# Altium PCB gY-950A20200704V1.PcbDoc (part 4 of 5)
Units mm, origin at the board's own origin, x right, y up, seen from the top; angles counter-clockwise.
Board outline 59.48 x 100.3 mm, 2 copper layers (Top Layer, Bottom Layer), stack 0.193 mm thick; 144 components, 124 nets, 550 pads, 234 vias.
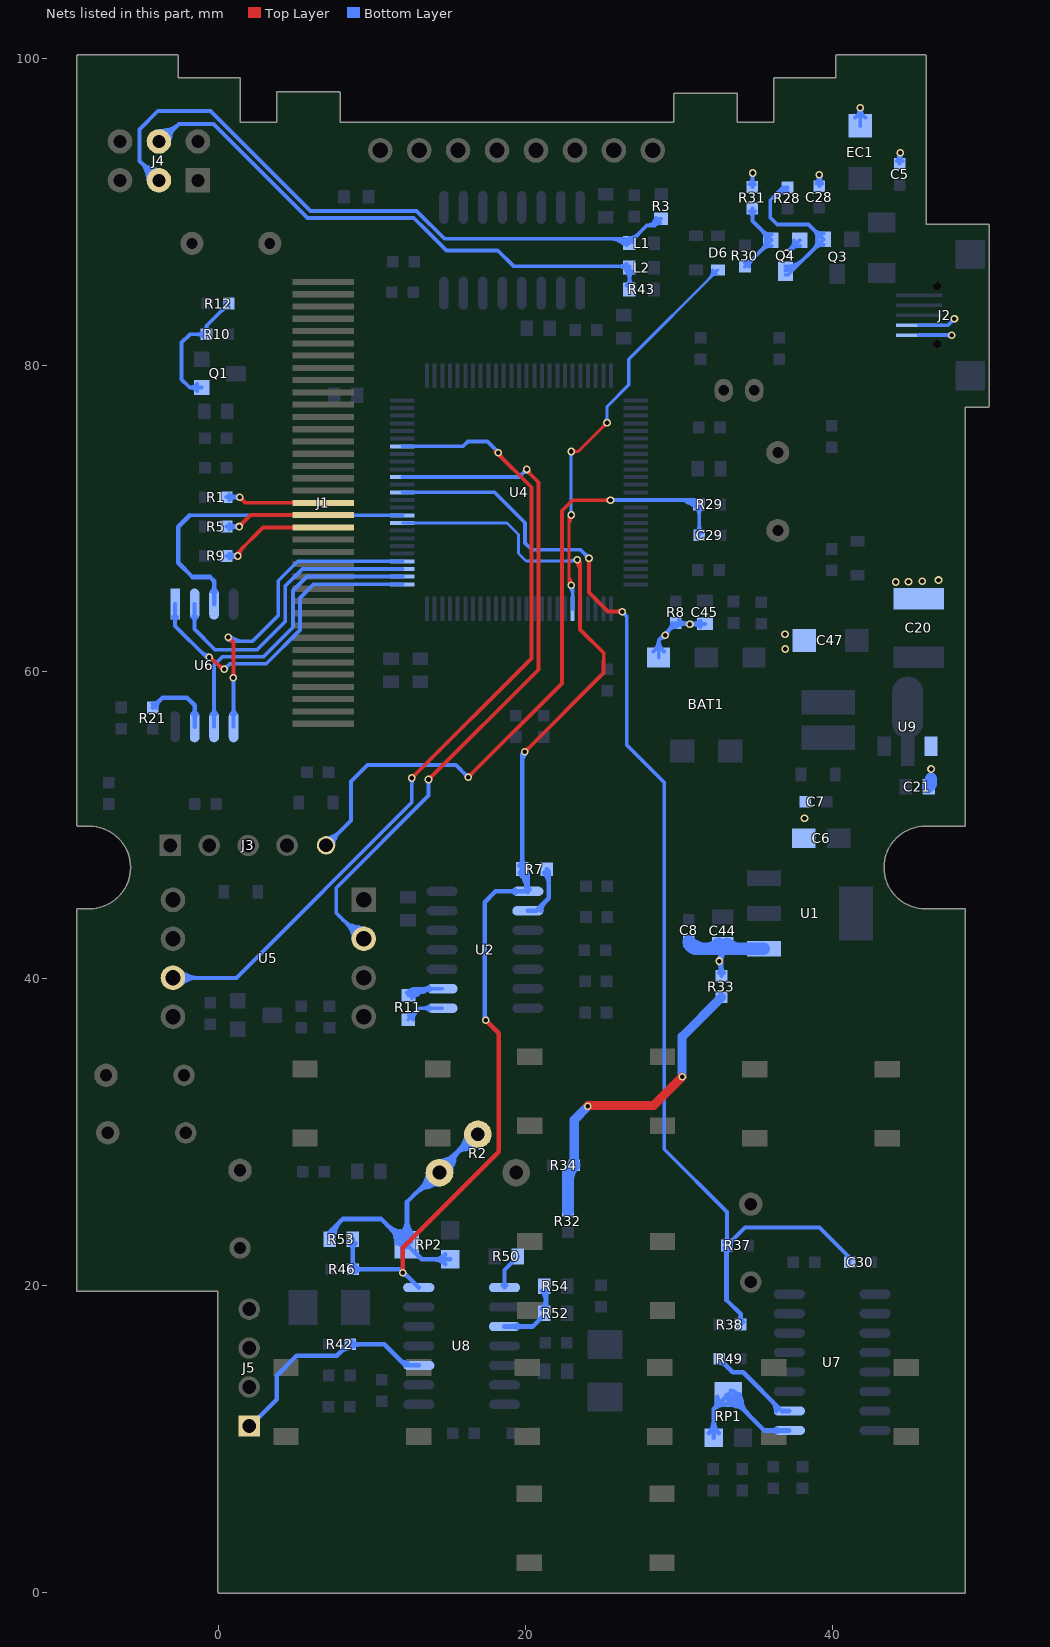
[diagram p4: the nets of this part, all layers, seen from the top]

## Via types
v1: diameter 0.5, hole 0.3, Top Layer to Bottom Layer, tented both sides, 234 vias

## Nets (pads, with @x,y where several pads share a name; then routed paths per layer and width w, separated by ;. In a path a pad name is that pad's centre, name@x,y a point inside that pad or via, vN(x,y) a via of type N, cw(c..) or ccw(c..) an arc to the next point about the centre after c; other vN are vias at no path point) (continued)
NetJ1_19: J1.19 R1.2 | length 12.7
  Top Layer w0.25: v1(1.353,71.395) 1.722,71.025 J1.19@6.807,71.025 ; 1.566,71.181 cw(c1.779,71.395) 1.478,71.395 ccw(c1.779,71.395) 1.566,71.181 ; 1.566,71.181 ccw(c1.353,70.968) 1.353,71.27 cw(c1.353,70.968) 1.566,71.181
  Bottom Layer w0.25: R1.2@0.489,71.395 v1(1.353,71.395) ; 0.904,71.34 cw(c1.033,70.858) v1@1.289,71.287 ; 0.904,71.34 cw(c1.033,70.858) v1@1.289,71.287 ; 0.904,71.34 cw(c1.033,70.858) v1@1.289,71.287 ; 0.904,71.449 ccw(c1.033,71.931) v1@1.289,71.502 ; 0.904,71.449 ccw(c1.033,71.931) v1@1.289,71.502 ; 0.904,71.449 ccw(c1.033,71.931) v1@1.289,71.502 ; 1.051,71.395 cw(c1.051,71.093) 1.264,71.306 ccw(c1.051,71.093) 1.051,71.395 ; 1.051,71.395 ccw(c1.051,71.696) 1.264,71.483 cw(c1.051,71.696) 1.051,71.395 ; v1@1.107,71.395 cw(c1.107,72.013) 0.67,71.576 ccw(c1.107,72.013) v1@1.107,71.395 ; v1@1.107,71.395 ccw(c1.107,70.777) 0.67,71.214 cw(c1.107,70.777) v1@1.107,71.395
NetJ1_20: J1.20 R5.2 | length 12.7
  Top Layer w0.25: v1(1.314,69.477) 2.063,70.225 J1.20@6.807,70.225 ; 1.528,69.69 cw(c1.314,69.904) 1.314,69.602 ccw(c1.314,69.904) 1.528,69.69 ; 1.528,69.69 ccw(c1.741,69.477) 1.439,69.477 cw(c1.741,69.477) 1.528,69.69
  Bottom Layer w0.25: R5.2@0.489,69.477 v1(1.314,69.477) ; 0.888,69.418 cw(c1.011,68.959) v1@1.251,69.369 ; 0.888,69.418 cw(c1.011,68.959) v1@1.251,69.369 ; 0.888,69.418 cw(c1.011,68.959) v1@1.251,69.369 ; 0.888,69.536 ccw(c1.011,69.995) v1@1.251,69.585 ; 0.888,69.536 ccw(c1.011,69.995) v1@1.251,69.585 ; 0.888,69.536 ccw(c1.011,69.995) v1@1.251,69.585 ; 1.013,69.477 cw(c1.013,69.175) 1.226,69.389 ccw(c1.013,69.175) 1.013,69.477 ; 1.013,69.477 ccw(c1.013,69.779) 1.226,69.565 cw(c1.013,69.779) 1.013,69.477 ; v1@1.107,69.477 cw(c1.107,70.095) 0.67,69.658 ccw(c1.107,70.095) v1@1.107,69.477 ; v1@1.107,69.477 ccw(c1.107,68.859) 0.67,69.296 cw(c1.107,68.859) v1@1.107,69.477
NetJ1_21: J1.21 R9.2 | length 14.8
  Top Layer w0.25: v1(1.226,67.559) 1.226,67.774 2.877,69.425 J1.21@6.807,69.425 ; v1@1.351,67.559 cw(c2.17,67.559) 1.59,68.138 ccw(c2.17,67.559) v1@1.351,67.559
  Bottom Layer w0.25: R9.2@0.489,67.559 v1(1.226,67.559) ; R9.2@0.708,67.426 cw(c1.065,67.208) v1@1.065,67.627 ; R9.2@0.708,67.692 ccw(c1.065,67.91) v1@1.065,67.492 ; 0.944,67.492 ccw(c0.944,67.105) R9.2@0.67,67.378 ; 0.944,67.627 cw(c0.944,68.014) R9.2@0.67,67.74 ; R9.2@0.67,67.378 cw(c1.107,66.941) v1@1.107,67.559 ; R9.2@0.67,67.378 cw(c1.107,66.941) v1@1.107,67.559 ; R9.2@0.67,67.74 ccw(c1.107,68.177) v1@1.107,67.559 ; R9.2@0.67,67.74 ccw(c1.107,68.177) v1@1.107,67.559 ; R9.2@0.855,67.492 cw(c0.96,67.099) v1@1.163,67.451 ; R9.2@0.855,67.492 cw(c0.96,67.099) v1@1.163,67.451 ; R9.2@0.855,67.492 cw(c0.96,67.099) v1@1.163,67.451 ; R9.2@0.855,67.627 ccw(c0.96,68.02) v1@1.163,67.668 ; R9.2@0.855,67.627 ccw(c0.96,68.02) v1@1.163,67.668 ; R9.2@0.855,67.627 ccw(c0.96,68.02) v1@1.163,67.668 ; 0.924,67.559 cw(c0.924,67.257) 1.137,67.471 ccw(c0.924,67.257) 0.924,67.559 ; 0.924,67.559 ccw(c0.924,67.861) 1.137,67.648 cw(c0.924,67.861) 0.924,67.559
NetJ4_3: J4.3 L1.1 R3.2 | length 67.4
  Bottom Layer w0.25: -4.783,92.783 ccw(c-3.702,93.072) J4.3@-3.927,91.976 ; -4.678,92.392 ccw(c-3.793,92.629) J4.3@-3.977,91.731 ; -4.645,92.921 cw(c-4.934,91.84) J4.3@-3.838,92.065 ; -4.254,92.816 cw(c-4.491,91.931) J4.3@-3.593,92.115 ; J4.3@-3.912,92.05 -5.182,93.32 -5.182,95.377 -3.988,96.571 -0.547,96.571 5.963,90.06 12.892,90.06 14.713,88.24 26.486,88.24 L1.1@26.759,87.967 27.896,89.103 ; 26.058,88.114 ccw(c26.255,88.455) L1.1@26.551,88.197 ; 26.321,87.963 ccw(c26.488,88.252) L1.1@26.74,88.033 ; R3.2@28.393,89.378 cw(c28.659,89.247) R3.2@28.764,89.524 ; R3.2@28.823,89.548 28.378,89.103 ; -5.064,93.202 cw(c-6.216,92.05) -4.587,92.05 ccw(c-6.216,92.05) -5.064,93.202 ; -5.064,93.202 ccw(c-3.912,94.354) -3.912,92.725 cw(c-3.912,94.354) -5.064,93.202 ; -4.637,92.775 cw(c-5.363,92.05) -4.337,92.05 ccw(c-5.363,92.05) -4.637,92.775 ; -4.637,92.775 ccw(c-3.912,93.501) -3.912,92.475 cw(c-3.912,93.501) -4.637,92.775 ; 27.896,89.103 ccw(c27.896,89.722) 28.503,89.601 cw(c27.896,89.722) 27.896,89.103 ; 27.896,89.103 28.378,89.103 ; 28.378,89.103 ccw(c28.062,89.42) 28.502,89.499 cw(c28.062,89.42) 28.378,89.103 ; 25.557,88.24 cw(c25.557,86.814) 26.565,87.822 ccw(c25.557,86.814) 25.557,88.24 ; 26.16,88.24 cw(c26.16,87.418) 26.741,87.999 ccw(c26.16,87.418) 26.16,88.24 ; L1.1@26.759,88.292 ccw(c26.759,89.076) 27.314,88.521 cw(c26.759,89.076) L1.1@26.759,88.292 ; L1.1@27.034,88.017 cw(c27.577,88.017) 27.193,88.401 ccw(c27.577,88.017) L1.1@27.034,88.017 ; 28.2,89.103 ccw(c28.2,89.662) 28.748,89.553 cw(c28.2,89.662) 28.2,89.103 ; 28.389,89.114 cw(c28.773,88.73) 28.773,89.273 ccw(c28.773,88.73) 28.389,89.114
NetJ4_4: J4.4 L2.1 R43.1 | length 54.1
  Bottom Layer w0.25: J4.4@-4.207,94.726 cw(c-3.194,94.259) -3.41,95.353 ; J4.4@-3.98,94.621 cw(c-2.645,94.006) -2.929,95.448 ; J4.4@-3.912,94.59 -3.759,94.59 -2.616,95.733 ; J4.4@-3.903,94.515 ccw(c-4.019,95.499) -3.062,95.243 ; J4.4@-3.874,94.267 ccw(c-3.972,95.105) -3.157,94.887 ; R43.1@26.759,84.944 26.759,86.455 19.209,86.455 18.182,87.482 14.83,87.482 13.534,88.777 13.528,88.777 12.698,89.607 5.776,89.607 -0.35,95.733 -2.616,95.733 ; -2.616,95.733 cw(c-3.758,96.875) -3.866,95.263 ccw(c-3.758,96.875) -2.616,95.733 ; 26.759,85.652 cw(c27.423,85.652) 26.953,86.122 ccw(c27.423,85.652) 26.759,85.652 ; 26.759,85.652 ccw(c26.095,85.652) 26.565,86.122 cw(c26.095,85.652) 26.759,85.652 ; 26.759,85.658 cw(c26.095,85.658) 26.565,85.188 ccw(c26.095,85.658) 26.759,85.658 ; 26.759,85.658 ccw(c27.423,85.658) 26.953,85.188 cw(c27.423,85.658) 26.759,85.658 ; J4.4@-3.883,95.014 ccw(c-3.807,96.145) -3.006,95.343 cw(c-3.807,96.145) J4.4@-3.883,95.014 ; J4.4@-3.237,94.59 cw(c-1.975,94.59) -2.867,95.482 ccw(c-1.975,94.59) J4.4@-3.237,94.59 ; 26.001,86.455 cw(c26.001,85.659) 26.565,86.222 ccw(c26.001,85.659) 26.001,86.455 ; 26.189,86.455 ccw(c26.189,86.986) 26.565,86.611 cw(c26.189,86.986) 26.189,86.455
NetQ1_1: Q1.G R10.2 R12.2 | length 16.2
  Bottom Layer w0.25: Q1.G@-1.129,78.542 -1.908,78.542 ; R12.2@0.641,84.018 -0.806,82.571 ; -1.908,78.542 cw(c-1.908,77.919) -1.422,78.308 ccw(c-1.908,77.919) -1.908,78.542 ; -1.908,78.542 ccw(c-1.908,79.164) -1.422,78.776 cw(c-1.908,79.164) -1.908,78.542 ; -1.908,78.542 -2.432,79.065 -2.432,81.478 -1.899,82.012 R10.2@-0.806,82.012 -0.806,82.571 ; -1.425,82.012 cw(c-1.425,81.394) -0.988,81.831 ccw(c-1.425,81.394) -1.425,82.012 ; -1.425,82.012 ccw(c-1.425,82.63) -0.988,82.193 cw(c-1.425,82.63) -1.425,82.012 ; -0.806,82.571 cw(c-1.288,82.571) -0.974,82.206 ccw(c-1.288,82.571) -0.806,82.571 ; -0.806,82.571 ccw(c-0.325,82.571) -0.639,82.206 cw(c-0.325,82.571) -0.806,82.571 ; 0.204,83.581 cw(c0.641,83.144) 0.641,83.762 ccw(c0.641,83.144) 0.204,83.581 ; 0.204,83.581 ccw(c-0.233,84.018) 0.385,84.018 cw(c-0.233,84.018) 0.204,83.581
NetQ3_1: Q3.G Q4.C R28.1 | length 24.4
  Bottom Layer w0.25: 36.557,91.195 ccw(c36.346,91.981) R28.1@37.06,91.591 ; Q4.C@36.937,85.901 37.111,85.901 Q3.G@39.411,88.201 38.433,89.179 36.398,89.179 35.941,89.637 35.941,90.754 36.774,91.588 R28.1@37.065,91.588 ; Q4.C@37.125,86.375 ccw(c37.371,86.802) 37.499,86.326 ; 38.771,87.561 cw(c39.411,86.921) 39.411,87.826 ccw(c39.411,86.921) 38.771,87.561 ; 38.771,87.561 ccw(c38.131,88.201) Q3.G@39.036,88.201 ; 38.771,87.561 ccw(c38.131,88.201) Q3.G@39.036,88.201 ; 38.771,88.842 cw(c38.131,88.201) Q3.G@39.036,88.201 ; 38.771,88.842 ccw(c39.411,89.482) 39.411,88.576 cw(c39.411,89.482) 38.771,88.842 ; 38.771,88.842 cw(c38.131,88.201) Q3.G@39.036,88.201 ; 36.132,90.945 cw(c37.065,90.012) 37.065,91.332 ccw(c37.065,90.012) 36.132,90.945 ; 36.559,91.372 cw(c37.065,90.866) 37.065,91.582 ccw(c37.065,90.866) 36.559,91.372 ; Q4.C@36.937,86.176 ccw(c36.937,87.258) 37.703,86.493 cw(c36.937,87.258) Q4.C@36.937,86.176 ; Q4.C@36.937,86.426 ccw(c36.937,88.112) 38.129,86.919 cw(c36.937,88.112) Q4.C@36.937,86.426
NetQ4_B: Q4.B R30.1 R31.2 | length 14.6
  Bottom Layer w0.25: R30.1@34.296,86.431 34.314,86.431 36.033,88.151 34.779,89.405 R31.2@34.779,90.216 ; 34.779,89.598 cw(c35.397,89.598) 34.96,90.035 ccw(c35.397,89.598) 34.779,89.598 ; 34.779,89.598 ccw(c34.161,89.598) 34.598,90.035 cw(c34.161,89.598) 34.779,89.598 ; 35.393,87.51 cw(c36.033,86.87) 36.033,87.776 ccw(c36.033,86.87) 35.393,87.51 ; 35.393,87.51 ccw(c34.753,88.151) Q4.B@35.658,88.151 ; 35.393,87.51 ccw(c34.753,88.151) Q4.B@35.658,88.151 ; 35.393,88.791 cw(c34.753,88.151) Q4.B@35.658,88.151 ; 35.393,88.791 ccw(c36.033,89.431) 36.033,88.526 cw(c36.033,89.431) 35.393,88.791 ; 35.393,88.791 cw(c34.753,88.151) Q4.B@35.658,88.151 ; R30.1@34.296,86.687 ccw(c34.296,87.348) 34.763,86.881 cw(c34.296,87.348) R30.1@34.296,86.687 ; R30.1@34.552,86.431 cw(c35.128,86.431) 34.721,86.838 ccw(c35.128,86.431) R30.1@34.552,86.431
NetR2_2: R2.2 R2.3 R53.2 RP2.2 RP2.3 | length 76.7
  Bottom Layer w0.3: R53.2@7.226,23.021 7.226,23.482 8.077,24.333 10.578,24.333 RP2.3@12.259,22.652 ; R53.2@7.248,23.085 ccw(c6.878,23.726) 7.593,23.534 ; 11.298,23.66 cw(c10.965,22.416) RP2.3@12.21,22.74 ; RP2.3@11.504,23.145 ccw(c12.35,23.371) RP2.3@12.223,22.505 ; RP2.3@11.795,23.526 cw(c11.537,22.565) RP2.3@12.501,22.815 ; 13.465,26.741 cw(c14.468,26.472) R2.2@14.365,27.505 ; 13.574,26.39 ccw(c13.223,27.702) R2.2@14.524,27.313 ; R2.2@14.231,27.371 cw(c15.264,27.268) 14.995,28.271 ; R2.2@14.423,27.212 ccw(c14.034,28.513) 15.346,28.162 ; RP2.2@15.085,21.696 13.215,21.696 RP2.3@12.259,22.652 ; 15.965,29.241 cw(c16.968,28.972) R2.3@16.865,30.005 ; 16.074,28.89 ccw(c15.723,30.202) R2.3@17.024,29.813 ; R2.3@16.88,30.059 14.38,27.559 12.259,25.438 RP2.3@12.259,22.652 ; 12.259,23.597 cw(c11.414,23.597) 12.011,23 ccw(c11.414,23.597) 12.259,23.597 ; 12.259,23.597 ccw(c13.104,23.597) 12.506,23 cw(c13.104,23.597) 12.259,23.597 ; 12.259,24.321 cw(c10.69,24.321) 11.799,23.212 ccw(c10.69,24.321) 12.259,24.321 ; 12.259,24.321 ccw(c13.828,24.321) 12.718,23.212 cw(c13.828,24.321) 12.259,24.321 ; 13.998,21.696 cw(c13.998,20.609) 14.767,21.377 ccw(c13.998,20.609) 13.998,21.696 ; 13.998,21.696 ccw(c13.998,22.782) 14.767,22.014 cw(c13.998,22.782) 13.998,21.696 ; R53.2@7.183,23.123 cw(c7.946,23.123) 7.406,23.662 ccw(c7.946,23.123) R53.2@7.183,23.123 ; R53.2@7.483,23.123 cw(c8.97,23.123) 7.918,24.174 ccw(c8.97,23.123) R53.2@7.483,23.123 ; 10.978,23.932 ccw(c12.259,25.213) 12.259,23.402 cw(c12.259,25.213) 10.978,23.932 ; 11.22,23.691 cw(c10.281,22.752) 11.609,22.752 ccw(c10.281,22.752) 11.22,23.691 ; RP2.3@11.491,23.42 ccw(c12.259,24.188) 12.259,23.102 cw(c12.259,24.188) RP2.3@11.491,23.42 ; 12.753,25.932 cw(c14.38,24.305) 14.38,26.606 ccw(c14.38,24.305) 12.753,25.932 ; 13.244,26.422 ccw(c12.31,27.356) 13.63,27.356 cw(c12.31,27.356) 13.244,26.422 ; 13.265,26.444 cw(c14.38,25.329) 14.38,26.906 ccw(c14.38,25.329) 13.265,26.444 ; R2.2@14.38,28.106 ccw(c14.38,29.426) 15.314,28.492 cw(c14.38,29.426) R2.2@14.38,28.106 ; R2.2@14.83,27.356 cw(c16.407,27.356) 15.292,28.471 ccw(c16.407,27.356) R2.2@14.83,27.356 ; R2.2@15.13,27.356 cw(c17.431,27.356) 15.804,28.983 ccw(c17.431,27.356) R2.2@15.13,27.356 ; 15.253,28.432 cw(c16.88,26.805) 16.88,29.106 ccw(c16.88,26.805) 15.253,28.432 ; 15.744,28.922 ccw(c14.81,29.856) 16.13,29.856 cw(c14.81,29.856) 15.744,28.922 ; 15.765,28.944 cw(c16.88,27.829) 16.88,29.406 ccw(c16.88,27.829) 15.765,28.944
NetR11_1: R11.1 U2.8 | length 6
  Bottom Layer w0.25: R11.1@12.338,37.325 13.086,38.073 U2.8@14.554,38.073 ; 13.409,38.073 cw(c13.409,37.639) 13.716,37.946 ccw(c13.409,37.639) 13.409,38.073 ; 13.409,38.073 ccw(c13.409,38.507) 13.716,38.201 cw(c13.409,38.507) 13.409,38.073 ; R11.1@12.388,37.6 ccw(c12.388,38.144) 12.772,37.759 cw(c12.388,38.144) R11.1@12.388,37.6 ; R11.1@12.663,37.325 cw(c13.448,37.325) 12.893,37.88 ccw(c13.448,37.325) R11.1@12.663,37.325
NetR11_2: R11.2 U2.9 | length 15.8
  Bottom Layer w0.25: R11.2@12.351,38.925 12.769,39.343 ; R11.2@12.413,38.947 ccw(c12.685,39.444) 12.975,38.958 ; R11.2@12.472,39.191 ccw(c12.665,39.912) 13.038,39.266 ; R11.2@12.533,39.167 ccw(c12.928,39.889) 13.35,39.182 ; R11.2@12.666,38.854 cw(c13.228,38.704) 12.937,39.207 ; U2.9@14.554,39.343 12.769,39.343 ; 12.769,39.343 cw(c12.423,39.689) 12.409,39.2 ccw(c12.423,39.689) 12.769,39.343 ; 12.769,39.343 ccw(c13.036,39.076) 12.668,38.989 cw(c13.036,39.076) 12.769,39.343 ; 13.409,39.343 cw(c13.409,38.909) 13.716,39.216 ccw(c13.409,38.909) 13.409,39.343 ; 13.409,39.343 ccw(c13.409,39.777) 13.716,39.471 cw(c13.409,39.777) 13.409,39.343 ; R11.2@12.242,39.084 cw(c12.867,38.46) 12.867,39.343 ccw(c12.867,38.46) R11.2@12.242,39.084 ; R11.2@12.418,38.908 cw(c13.47,37.856) 13.47,39.343 ccw(c13.47,37.856) R11.2@12.418,38.908 ; R11.2@12.595,38.731 cw(c14.074,37.252) 14.074,39.343 ccw(c14.074,37.252) R11.2@12.595,38.731 ; 13.3,39.136 ccw(c13.135,39.752) 13.687,39.433 cw(c13.135,39.752) 13.3,39.136
NetR21_1: R21.1 U6.7 | length 7.6
  Bottom Layer w0.3: R21.1@-4.318,57.683 -3.683,58.318 -2.083,58.318 -1.585,57.821 U6.7@-1.585,56.423 ; -3.924,58.078 cw(c-4.318,58.472) -4.318,57.914 ccw(c-4.318,58.472) -3.924,58.078 ; -3.924,58.078 ccw(c-3.529,57.683) -4.087,57.683 cw(c-3.529,57.683) -3.924,58.078 ; -1.585,57.526 cw(c-1.989,57.526) -1.703,57.24 ccw(c-1.989,57.526) -1.585,57.526 ; -1.585,57.526 ccw(c-1.181,57.526) -1.467,57.24 cw(c-1.181,57.526) -1.585,57.526
NetR32_2: R32.2 R33.1 R34.2 | length 21.5
  Top Layer w0.6: v1@24.079,31.725 28.327,31.725 v1(30.201,33.598)
  Bottom Layer w0.6: R34.2@23.165,27.838 23.165,30.785 v1(24.054,31.674) ; v1(30.201,33.598) 30.201,36.22 R33.1@32.766,38.786
  Bottom Layer w0.8: R32.2@22.758,24.867 22.758,27.432 R34.2@23.165,27.838 ; 22.758,26.903 cw(c24.1,26.903) R34.2@23.151,27.852
NetR49_1: R49.1 U7.10 | length 9.2
  Bottom Layer w0.3: R49.1@32.614,15.215 33.503,14.326 34.188,14.326 36.703,11.811 U7.10@37.193,11.811 ; 33.008,14.82 cw(c33.402,15.215) 32.845,15.215 ccw(c33.402,15.215) 33.008,14.82 ; 33.008,14.82 ccw(c32.614,14.426) 32.614,14.984 cw(c32.614,14.426) 33.008,14.82 ; 36.061,12.453 cw(c35.419,11.811) 36.327,11.811 ccw(c35.419,11.811) 36.061,12.453
NetR50_2: R50.2 U8.1 | length 3.7
  Bottom Layer w0.25: U8.1@18.618,19.863 18.618,21.01 R50.2@19.494,21.886 ; 18.618,20.297 cw(c18.184,20.297) 18.491,19.99 ccw(c18.184,20.297) 18.618,20.297 ; 18.618,20.297 ccw(c19.052,20.297) 18.745,19.99 cw(c19.052,20.297) 18.618,20.297
NetR52_1: R52.1 R54.2 U8.3 | length 9.1
  Bottom Layer w0.3: U8.3@18.618,17.323 20.468,17.323 21.323,18.178 21.323,19.846 R54.2@21.222,19.948 ; 19.703,17.323 cw(c19.703,17.696) 19.439,17.432 ccw(c19.703,17.696) 19.703,17.323 ; 19.703,17.323 ccw(c19.703,16.949) 19.439,17.213 cw(c19.703,16.949) 19.703,17.323 ; R52.1@21.04,18.461 ccw(c20.358,19.143) 21.323,19.143 cw(c20.358,19.143) R52.1@21.04,18.461 ; R54.2@21.04,19.665 cw(c20.358,18.982) 21.323,18.982 ccw(c20.358,18.982) R54.2@21.04,19.665
NetRP1_2: RP1.2 RP1.3 U7.9 | length 26.4
  Bottom Layer w0.3: RP1.2@32.262,10.061 32.262,11.931 ; RP1.3@33.071,12.851 ccw(c33.938,12.978) RP1.3@33.711,12.132 ; RP1.3@33.306,12.839 cw(c32.983,11.593) 34.226,11.926 ; RP1.3@33.381,13.129 cw(c33.131,12.166) RP1.3@34.093,12.423 ; U7.9@37.193,10.541 35.565,10.541 RP1.3@33.218,12.887 32.262,11.931 ; 32.262,11.148 cw(c31.176,11.148) 31.944,10.379 ccw(c31.176,11.148) 32.262,11.148 ; 32.262,11.148 ccw(c33.348,11.148) 32.58,10.379 cw(c33.348,11.148) 32.262,11.148 ; 32.262,11.931 cw(c33.01,11.183) 33.077,12.239 ccw(c33.01,11.183) 32.262,11.931 ; 32.262,11.931 ccw(c31.661,12.532) 32.487,12.733 cw(c31.661,12.532) 32.262,11.931 ; 36.108,10.541 cw(c36.108,10.167) 36.372,10.432 ccw(c36.108,10.167) 36.108,10.541 ; 36.108,10.541 ccw(c36.108,10.915) 36.372,10.65 cw(c36.108,10.915) 36.108,10.541 ; RP1.3@33.318,12.237 cw(c33.318,10.909) 34.257,11.848 ccw(c33.318,10.909) RP1.3@33.318,12.237 ; RP1.3@33.668,12.887 ccw(c34.755,12.887) 33.987,12.119 cw(c34.755,12.887) RP1.3@33.668,12.887 ; RP1.3@33.968,12.887 ccw(c35.779,12.887) 34.499,11.607 cw(c35.779,12.887) RP1.3@33.968,12.887
PGND: BAT1.2 C5.2 C6.1 C7.1 C8.1 C20.2 C21.2 C28.1 C44.1 C45.2 C47.2 EC1.2 J2.1 J2.2 Q4.E R8.1 R31.1 R33.2 U1.1 U9.1 | length 89
  Bottom Layer w0.25: BAT1.2@28.673,60.935 28.673,62.074 ; R8.1@29.794,63.195 28.673,62.074 ; R8.1@29.858,63.132 C45.2@31.691,63.132 ; R33.2@32.584,40.363 ccw(c32.291,40.654) 32.69,40.761 ; 32.703,40.751 cw(c32.967,40.904) v1@32.716,41.077 ; 32.703,41.545 ccw(c32.967,41.392) v1@32.716,41.219 ; 32.728,40.621 ccw(c33.072,40.714) R33.2@32.894,40.405 ; v1@32.737,41.171 cw(c33.172,41.251) 32.859,41.564 ; R33.2@32.766,40.183 32.766,41.95 C44.1@32.766,42.137 ; R31.1@34.779,91.613 v1@34.779,92.513 ; v1(37.008,87.281) Q4.E@37.877,88.151 ; v1@37.013,87.406 ccw(c37.026,87.74) 37.316,87.573 ; v1@37.133,87.286 cw(c37.466,87.3) 37.299,87.589 ; C28.1@39.006,91.877 ccw(c38.754,92.259) v1@39.212,92.259 ; 39.081,92.123 cw(c38.686,92.123) C28.1@38.966,91.844 ; v1@39.081,92.259 ccw(c39.539,92.259) C28.1@39.287,91.877 ; C28.1@39.147,91.663 v1(39.147,92.425) ; 39.212,92.123 ccw(c39.607,92.123) C28.1@39.328,91.844 ; EC1.2@41.814,95.6 v1(41.814,96.779) ; C5.2@44.266,93.367 ccw(c44.146,93.608) 44.406,93.538 ccw(c44.542,93.501) C5.2@44.485,93.372 ; C5.2@44.381,93.138 v1@44.381,93.886 ; J2.1@45.629,81.956 45.632,81.96 v1(47.771,81.96) ; J2.2@45.629,82.606 47.529,82.606 v1(47.955,83.033) ; 28.673,62.074 cw(c27.699,62.074) 28.332,61.334 ccw(c27.699,62.074) 28.673,62.074 ; 28.673,62.074 ccw(c29.646,62.074) 29.014,61.334 cw(c29.646,62.074) 28.673,62.074 ; 29.357,62.758 cw(c29.794,62.321) 29.794,62.939 ccw(c29.794,62.321) 29.357,62.758 ; 29.357,62.758 ccw(c28.92,63.195) 29.538,63.195 cw(c28.92,63.195) 29.357,62.758 ; 30.353,63.189 ccw(c30.453,63.562) v1@30.646,63.227 ; 30.353,63.189 ccw(c30.453,63.562) v1@30.646,63.227 ; 30.353,63.189 ccw(c30.453,63.562) v1@30.646,63.227 ; v1@30.771,63.227 ccw(c30.99,63.606) 31.103,63.184 ; v1@30.771,63.227 ccw(c30.99,63.606) 31.103,63.184 ; v1@30.771,63.227 ccw(c30.99,63.606) 31.103,63.184 ; v1@30.776,63.014 cw(c31.022,62.625) 31.142,63.07 ; v1@30.776,63.014 cw(c31.022,62.625) 31.142,63.07 ; v1@30.776,63.014 cw(c31.022,62.625) 31.142,63.07 ; v1@30.91,63.132 cw(c30.91,62.452) 31.39,62.933 ccw(c30.91,62.452) v1@30.91,63.132 ; v1@30.91,63.132 ccw(c30.91,63.811) 31.39,63.331 cw(c30.91,63.811) v1@30.91,63.132 ; v1@32.551,41.256 ccw(c32.131,41.984) C44.1@32.943,41.767 ; v1@32.551,41.256 ccw(c32.131,41.984) C44.1@32.943,41.767 ; v1@32.551,41.256 ccw(c32.131,41.984) C44.1@32.943,41.767 ; 32.766,40.801 cw(c32.148,40.801) 32.585,40.364 ccw(c32.148,40.801) 32.766,40.801 ; 32.766,40.801 ccw(c33.384,40.801) 32.947,40.364 cw(c33.384,40.801) 32.766,40.801 ; 34.779,92.231 cw(c34.161,92.231) 34.598,91.794 ccw(c34.161,92.231) 34.779,92.231 ; 34.779,92.231 ccw(c35.397,92.231) 34.96,91.794 cw(c35.397,92.231) 34.779,92.231 ; v1@36.975,87.402 ccw(c36.823,87.97) 37.333,87.676 ; v1@36.975,87.402 ccw(c36.823,87.97) 37.333,87.676 ; v1@36.975,87.402 ccw(c36.823,87.97) 37.333,87.676 ; v1@37.129,87.249 cw(c37.697,87.097) 37.403,87.606 ; v1@37.129,87.249 cw(c37.697,87.097) 37.403,87.606 ; v1@37.129,87.249 cw(c37.697,87.097) 37.403,87.606 ; 37.221,87.495 cw(c37.008,87.708) 37.008,87.406 ccw(c37.008,87.708) 37.221,87.495 ; 37.221,87.495 ccw(c37.435,87.281) 37.133,87.281 cw(c37.435,87.281) 37.221,87.495 ; 37.237,87.51 cw(c37.877,86.87) 37.877,87.776 ccw(c37.877,86.87) 37.237,87.51 ; 37.237,87.51 ccw(c36.597,88.151) 37.502,88.151 cw(c36.597,88.151) 37.237,87.51 ; C28.1@38.966,91.844 ccw(c38.529,92.281) v1@39.147,92.281 ; C28.1@38.966,91.844 ccw(c38.529,92.281) v1@39.147,92.281 ; v1@39.038,92.363 cw(c38.667,92.148) C28.1@39.081,92.037 ; v1@39.038,92.363 cw(c38.667,92.148) C28.1@39.081,92.037 ; v1@39.038,92.363 cw(c38.667,92.148) C28.1@39.081,92.037 ; 39.147,92.124 cw(c39.448,92.124) 39.235,92.337 ccw(c39.448,92.124) 39.147,92.124 ; 39.147,92.124 ccw(c38.845,92.124) 39.058,92.337 cw(c38.845,92.124) 39.147,92.124 ; v1@39.147,92.281 ccw(c39.765,92.281) C28.1@39.328,91.844 ; v1@39.147,92.281 ccw(c39.765,92.281) C28.1@39.328,91.844 ; C28.1@39.212,92.037 cw(c39.627,92.148) v1@39.255,92.363 ; C28.1@39.212,92.037 cw(c39.627,92.148) v1@39.255,92.363 ; C28.1@39.212,92.037 cw(c39.627,92.148) v1@39.255,92.363 ; v1@41.705,96.717 cw(c41.444,96.566) 41.736,96.488 ; v1@41.705,96.717 cw(c41.444,96.566) 41.736,96.488 ; v1@41.705,96.717 cw(c41.444,96.566) 41.736,96.488 ; 41.736,96.488 cw(c42.027,96.41) v1@41.876,96.671 ; 41.736,96.488 cw(c42.027,96.41) v1@41.876,96.671 ; 41.736,96.488 cw(c42.027,96.41) v1@41.876,96.671 ; v1@41.751,96.671 cw(c41.6,96.41) 41.892,96.488 ; v1@41.751,96.671 cw(c41.6,96.41) 41.892,96.488 ; v1@41.751,96.671 cw(c41.6,96.41) 41.892,96.488 ; 41.814,96.478 cw(c42.115,96.478) 41.902,96.691 ccw(c42.115,96.478) 41.814,96.478 ; 41.814,96.478 ccw(c41.512,96.478) 41.725,96.691 cw(c41.512,96.478) 41.814,96.478 ; v1(41.814,96.779) cw(c41.04,96.779) 41.464,96.133 ccw(c41.04,96.779) v1(41.814,96.779) ; v1(41.814,96.779) ccw(c42.587,96.779) 42.163,96.133 cw(c42.587,96.779) v1(41.814,96.779) ; 41.892,96.488 cw(c42.183,96.566) v1@41.922,96.717 ; 41.892,96.488 cw(c42.183,96.566) v1@41.922,96.717 ; 41.892,96.488 cw(c42.183,96.566) v1@41.922,96.717 ; v1@44.316,93.79 cw(c44.105,93.669) 44.341,93.605 ; v1@44.316,93.79 cw(c44.105,93.669) 44.341,93.605 ; v1@44.316,93.79 cw(c44.105,93.669) 44.341,93.605 ; 44.32,93.526 cw(c44.667,93.433) v1@44.487,93.745 ; 44.32,93.526 cw(c44.667,93.433) v1@44.487,93.745 ; 44.32,93.526 cw(c44.667,93.433) v1@44.487,93.745 ; v1@44.381,93.756 cw(c43.763,93.756) 44.2,93.319 ccw(c43.763,93.756) v1@44.381,93.756 ; v1@44.381,93.756 ccw(c44.999,93.756) 44.562,93.319 cw(c44.999,93.756) v1@44.381,93.756 ; 44.434,93.559 cw(c44.612,93.607) v1@44.5,93.753 ; 44.434,93.559 cw(c44.612,93.607) v1@44.5,93.753 ; 44.434,93.559 cw(c44.612,93.607) v1@44.5,93.753 ; 47.469,81.96 cw(c47.469,81.658) 47.683,81.871 ccw(c47.469,81.658) 47.469,81.96 ; 47.469,81.96 ccw(c47.469,82.261) 47.683,82.048 cw(c47.469,82.261) 47.469,81.96 ; 47.742,82.819 cw(c47.955,82.606) 47.955,82.908 ccw(c47.955,82.606) 47.742,82.819 ; 47.742,82.819 ccw(c47.528,83.033) 47.83,83.033 cw(c47.528,83.033) 47.742,82.819 ; 28.678,62.079 cw(c29.108,61.649) 29.108,62.257 ccw(c29.108,61.649) 28.678,62.079 ; v1@29.233,62.382 cw(c29.842,62.382) 29.412,62.813 ccw(c29.842,62.382) v1@29.233,62.382 ; R8.1@29.975,63.014 cw(c30.259,62.73) 30.259,63.132 ccw(c30.259,62.73) R8.1@29.975,63.014 ; R8.1@29.975,63.376 ccw(c30.565,63.966) 30.565,63.132 cw(c30.565,63.966) R8.1@29.975,63.376 ; 30.376,63.132 cw(c30.376,62.786) 30.62,63.031 ccw(c30.376,62.786) 30.376,63.132 ; 30.438,63.132 ccw(c30.438,63.39) 30.62,63.207 cw(c30.438,63.39) 30.438,63.132 ; v1@30.797,63.031 cw(c31.041,62.786) 31.041,63.132 ccw(c31.041,62.786) v1@30.797,63.031 ; v1@30.797,63.207 ccw(c30.979,63.39) 30.979,63.132 cw(c30.979,63.39) v1@30.797,63.207 ; v1@32.525,41.06 cw(c31.944,40.478) 32.766,40.478 ccw(c31.944,40.478) v1@32.525,41.06 ; v1@32.525,41.236 ccw(c31.944,41.818) 32.766,41.818 cw(c31.944,41.818) v1@32.525,41.236 ; C44.1@32.589,41.959 cw(c32.161,41.531) 32.766,41.531 ccw(c32.161,41.531) C44.1@32.589,41.959 ; v1@32.766,41.107 cw(c33.971,41.107) 33.119,41.959 ccw(c33.971,41.107) v1@32.766,41.107 ; 32.766,41.711 cw(c33.368,41.711) 32.942,42.136 ccw(c33.368,41.711) 32.766,41.711 ; v1@34.71,92.444 cw(c34.542,92.277) 34.779,92.277 ccw(c34.542,92.277) v1@34.71,92.444 ; 34.779,92.184 cw(c35.146,92.184) 34.886,92.444 ccw(c35.146,92.184) 34.779,92.184 ; C5.2@44.381,93.446 cw(c44.831,93.446) 44.513,93.765 ccw(c44.831,93.446) C5.2@44.381,93.446
  Bottom Layer w0.8: C8.1@30.633,42.444 31.127,41.95 ; U1.1@35.542,41.95 32.766,41.95 31.127,41.95 ; C21.2@46.266,52.519 C21.2@46.431,52.684 ; 31.127,41.95 cw(c31.127,42.464) 30.614,42.444 ccw(c31.127,42.464) 31.127,41.95 ; C8.1@30.62,42.431 ccw(c31.78,43.591) 31.78,41.95 cw(c31.78,43.591) C8.1@30.62,42.431 ; 31.751,41.95 ccw(c31.751,43.127) 32.583,42.295 cw(c31.751,43.127) 31.751,41.95 ; C44.1@33.125,42.295 ccw(c33.957,43.127) 33.957,41.95 cw(c33.957,43.127) C44.1@33.125,42.295 ; C21.2@46.261,52.625 ccw(c45.852,53.034) 46.431,53.034 cw(c45.852,53.034) C21.2@46.261,52.625
  other v1: 32.614,41.148 38.176,50.47 46.431,53.67 36.932,61.493 29.108,62.382 36.906,62.459 30.709,63.119 44.12,65.862 44.958,65.888 45.847,65.913 46.914,65.989 34.798,92.532 44.425,93.853
RE1: C30.1 R37.1 R38.1 U4.63 | length 90
  Top Layer w0.25: v1(24.13,67.412) 24.13,65.176 25.375,63.932 v1(26.289,63.932) ; 24.13,67.11 cw(c24.432,67.11) 24.218,67.323 ccw(c24.432,67.11) 24.13,67.11 ; 24.13,67.11 ccw(c23.828,67.11) 24.042,67.323 cw(c23.828,67.11) 24.13,67.11 ; 25.987,63.932 cw(c25.987,63.63) 26.201,63.843 ccw(c25.987,63.63) 25.987,63.932 ; 25.987,63.932 ccw(c25.987,64.234) 26.201,64.02 cw(c25.987,64.234) 25.987,63.932
  Bottom Layer w0.25: U4.63@11.966,71.712 17.975,71.712 19.962,69.725 19.962,68.404 20.396,67.97 23.571,67.97 v1@24.054,67.488 ; v1(26.289,63.932) 26.594,63.627 26.594,55.245 29.038,52.801 29.038,28.874 33.122,24.79 R37.1@33.122,22.606 34.29,23.774 39.167,23.774 41.124,21.818 C30.1@41.124,21.513 ; 23.917,67.625 cw(c23.703,67.412) 24.005,67.412 ccw(c23.703,67.412) 23.917,67.625 ; 23.917,67.625 ccw(c24.13,67.838) 24.13,67.537 cw(c24.13,67.838) 23.917,67.625 ; 26.502,63.718 cw(c26.716,63.932) 26.414,63.932 ccw(c26.716,63.932) 26.502,63.718 ; 26.502,63.718 ccw(c26.289,63.505) 26.289,63.807 cw(c26.289,63.505) 26.502,63.718 ; 33.122,23.224 cw(c32.504,23.224) 32.941,22.787 ccw(c32.504,23.224) 33.122,23.224 ; 33.122,23.224 ccw(c33.74,23.224) 33.303,22.787 cw(c33.74,23.224) 33.122,23.224 ; 33.559,23.043 cw(c33.122,23.48) 33.122,22.862 ccw(c33.122,23.48) 33.559,23.043 ; 33.559,23.043 ccw(c33.996,22.606) 33.378,22.606 cw(c33.996,22.606) 33.559,23.043
  Bottom Layer w0.3: R37.1@33.122,22.606 33.096,22.581 33.096,19.05 34.011,18.136 R38.1@34.011,17.45 ; 34.011,18.007 cw(c33.453,18.007) 33.847,17.613 ccw(c33.453,18.007) 34.011,18.007 ; 34.011,18.007 ccw(c34.568,18.007) 34.174,17.613 cw(c34.568,18.007) 34.011,18.007 ; R37.1@32.958,22.443 cw(c32.625,22.11) 33.096,22.11 ccw(c32.625,22.11) R37.1@32.958,22.443 ; 33.096,21.987 cw(c33.741,21.987) 33.285,22.443 ccw(c33.741,21.987) 33.096,21.987
RE2: R7.1 R46.2 R53.1 U2.1 U4.59 U8.14 | length 98.2
  Top Layer w0.25: v1(19.939,54.788) 25.07,59.919 25.07,60.707 25.089,60.727 25.089,61.225 23.54,62.774 23.54,67.138 v1(23.368,67.31) ; 23.475,66.884 cw(c23.787,67.064) v1@23.476,67.247 ; 20.152,55.001 cw(c19.939,55.215) 19.939,54.913 ccw(c19.939,55.215) 20.152,55.001 ; 20.152,55.001 ccw(c20.366,54.788) 20.064,54.788 cw(c20.366,54.788) 20.152,55.001 ; v1@23.28,67.222 cw(c22.651,66.593) 23.54,66.593 ccw(c22.651,66.593) v1@23.28,67.222
  Top Layer w0.3: v1(11.989,20.828) 11.989,22.454 18.237,28.702 18.237,35.001 18.237,36.449 v1(17.399,37.287)
  Bottom Layer w0.203: U4.59@11.966,69.712 18.781,69.712 19.533,68.961 19.533,67.726 20.025,67.234 v1@23.165,67.234 ; 22.826,67.234 ccw(c22.826,67.852) 23.263,67.415 cw(c22.826,67.852) 22.826,67.234
  Bottom Layer w0.3: R53.1@8.725,23.021 8.725,21.069 R46.2@8.738,21.057 11.836,21.057 U8.14@13.03,19.863 ; v1@17.323,37.287 17.323,44.983 18.033,45.693 U2.1@20.142,45.693 20.142,46.781 R7.1@19.774,47.149 v1@19.774,54.623 ; R7.1@19.73,47.123 ccw(c20.109,46.914) 19.739,46.69 ; R7.1@19.756,46.849 cw(c19.724,46.396) 20.113,46.631 ; R7.1@19.993,46.978 ccw(c20.635,46.624) 20.007,46.245 ; R7.1@20.017,47.039 ccw(c20.443,46.933) R7.1@20.067,46.707 ; 8.725,22.3 cw(c9.344,22.3) 8.906,22.738 ccw(c9.344,22.3) 8.725,22.3 ; 8.725,22.3 ccw(c8.106,22.3) 8.544,22.738 cw(c8.106,22.3) 8.725,22.3 ; R46.2@8.901,21.22 ccw(c9.295,21.614) 9.295,21.057 ; R46.2@8.901,21.22 cw(c9.326,21.645) 8.725,21.645 ccw(c9.326,21.645) R46.2@8.901,21.22 ; R46.2@8.901,21.22 ccw(c9.295,21.614) 9.295,21.057 ; 9.295,21.057 ccw(c9.295,20.499) 8.901,20.893 cw(c9.295,20.499) 9.295,21.057 ; 19.057,45.693 cw(c19.057,45.32) 19.322,45.584 ccw(c19.057,45.32) 19.057,45.693 ; 19.057,45.693 ccw(c19.057,46.067) 19.322,45.803 cw(c19.057,46.067) 19.057,45.693 ; 19.774,47.802 cw(c19.17,47.802) 19.597,47.376 ccw(c19.17,47.802) 19.774,47.802 ; 19.774,47.802 ccw(c20.378,47.802) 19.951,47.376 cw(c20.378,47.802) 19.774,47.802 ; 20.142,46.067 cw(c19.768,46.067) 20.033,45.803 ccw(c19.768,46.067) 20.142,46.067 ; 20.142,46.067 ccw(c20.516,46.067) 20.252,45.803 cw(c20.516,46.067) 20.142,46.067 ; R46.2@8.574,21.22 ccw(c8.21,21.584) 8.725,21.584 cw(c8.21,21.584) R46.2@8.574,21.22 ; v1@11.989,20.728 cw(c11.989,20.303) 12.29,20.603 ccw(c11.989,20.303) v1@11.989,20.728 ; 17.323,37.713 ccw(c17.824,37.713) 17.47,37.358 cw(c17.824,37.713) 17.323,37.713 ; R7.1@19.601,46.919 cw(c18.376,45.646) 20.142,45.646 ccw(c18.376,45.646) R7.1@19.601,46.919 ; 19.774,54.148 cw(c20.579,54.148) 20.01,54.717 ccw(c20.579,54.148) 19.774,54.148 ; R7.1@19.809,47.135 cw(c19.055,46.351) 20.142,46.351 ccw(c19.055,46.351) R7.1@19.809,47.135 ; U2.1@20.008,45.771 ccw(c19.721,45.937) 20.041,46.023 cw(c19.721,45.937) U2.1@20.008,45.771 ; 20.026,46.08 ccw(c20.427,46.187) 20.22,45.827 cw(c20.427,46.187) 20.026,46.08
RE2-OUT: R7.2 U2.2 | length 6.5
  Bottom Layer w0.3: U2.2@20.142,44.423 20.7,44.423 21.511,45.235 21.511,46.999 R7.2@21.374,47.136 ; U2.2@21.008,44.423 cw(c21.753,44.423) 21.226,44.95 ccw(c21.753,44.423) U2.2@21.008,44.423 ; R7.2@21.197,46.909 cw(c20.439,46.151) 21.511,46.151 ccw(c20.439,46.151) R7.2@21.197,46.909
RED: J5.1 R42.1 U8.10 | length 19.2
  Bottom Layer w0.3: J5.1@1.971,10.833 2.034,10.833 3.759,12.558 3.759,14.122 5.057,15.42 7.69,15.42 8.424,16.154 R42.1@8.56,16.154 10.77,16.154 12.141,14.783 U8.10@13.03,14.783 ; 9.117,16.154 cw(c9.117,16.712) 8.723,16.318 ccw(c9.117,16.712) 9.117,16.154 ; 9.117,16.154 ccw(c9.117,15.597) 8.723,15.991 cw(c9.117,15.597) 9.117,16.154 ; 7.934,15.664 cw(c8.56,15.039) 8.56,15.923 ccw(c8.56,15.039) 7.934,15.664 ; 11.751,15.173 ccw(c12.319,15.741) 12.319,14.938 cw(c12.319,15.741) 11.751,15.173
RESET: C29.2 J3.5 R29.1 U4.14 | length 63.4
  Top Layer w0.254: v1(16.256,53.137) 22.377,59.258 22.377,70.51 23.063,71.196 v1(25.527,71.196) ; 16.466,53.347 cw(c16.256,53.557) 16.256,53.26 ccw(c16.256,53.557) 16.466,53.347 ; 16.466,53.347 ccw(c16.676,53.137) 16.379,53.137 cw(c16.676,53.137) 16.466,53.347 ; 25.23,71.196 cw(c25.23,70.899) 25.44,71.109 ccw(c25.23,70.899) 25.23,71.196 ; 25.23,71.196 ccw(c25.23,71.493) 25.44,71.283 cw(c25.23,71.493) 25.23,71.196
  Bottom Layer w0.25: v1@25.543,71.212 U4.14@27.166,71.212 30.997,71.212 R29.1@31.293,70.917 31.317,70.892 C29.2@31.317,68.911 ; 30.506,71.085 ccw(c30.795,71.586) R29.1@31.14,71.122 ; 30.836,70.895 ccw(c31.042,71.253) R29.1@31.289,70.922 ; R29.1@31.04,70.876 ccw(c30.62,70.807) 30.833,71.176 ccw(c31.036,71.528) R29.1@31.194,71.153 ; R29.1@31.112,70.736 ccw(c29.962,69.586) 29.962,71.212 cw(c29.962,69.586) R29.1@31.112,70.736 ; R29.1@31.112,70.736 cw(c30.616,70.24) 31.317,70.24 ccw(c30.616,70.24) R29.1@31.112,70.736 ; 31.317,69.529 cw(c30.699,69.529) 31.136,69.092 ccw(c30.699,69.529) 31.317,69.529 ; 31.317,69.529 ccw(c31.935,69.529) 31.498,69.092 cw(c31.935,69.529) 31.317,69.529 ; v1@25.615,71.108 cw(c25.867,70.856) 25.867,71.212 ccw(c25.867,70.856) v1@25.615,71.108 ; v1@25.615,71.285 ccw(c25.79,71.459) 25.79,71.212 cw(c25.79,71.459) v1@25.615,71.285 ; 30.565,71.212 cw(c30.565,70.189) 31.289,70.913 ccw(c30.565,70.189) 30.565,71.212 ; 31.317,70.358 cw(c31.852,70.358) 31.474,70.736 ccw(c31.852,70.358) 31.317,70.358
  Bottom Layer w0.254: J3.5@6.951,48.703 cw(c7.733,48.543) 7.526,49.314 ; J3.5@6.985,48.696 8.611,50.321 8.611,52.857 9.677,53.924 15.443,53.924 v1@16.154,53.213 ; J3.5@6.992,48.662 ccw(c6.832,49.444) 7.603,49.237 ; 7.792,49.503 cw(c6.985,50.311) 6.985,49.169 ccw(c6.985,50.311) 7.792,49.503 ; 7.792,49.503 ccw(c8.6,48.696) 7.458,48.696 cw(c8.6,48.696) 7.792,49.503 ; 16.003,53.365 ccw(c16.256,53.618) 16.256,53.26 cw(c16.256,53.618) 16.003,53.365 ; 16.064,53.303 cw(c15.897,53.137) 16.133,53.137 ccw(c15.897,53.137) 16.064,53.303
RST: U4.69 U5.6 | length 66.1
  Top Layer w0.254: v1(12.573,53.086) 20.367,60.88 20.367,72.038 v1@18.034,74.371 ; 12.783,53.296 cw(c12.573,53.506) 12.573,53.209 ccw(c12.573,53.506) 12.783,53.296 ; 12.783,53.296 ccw(c12.993,53.086) 12.696,53.086 cw(c12.993,53.086) 12.783,53.296 ; v1@18.335,74.295 ccw(c18.877,74.295) 18.494,73.912 cw(c18.877,74.295) v1@18.335,74.295
  Bottom Layer w0.254: U5.6@-3.124,40.056 1.141,40.056 12.573,51.488 v1(12.573,53.086) ; U4.69@11.966,74.712 15.923,74.712 16.234,75.024 17.509,75.024 v1@18.237,74.295 ; -1.986,40.056 cw(c-1.986,41.067) -2.701,40.352 ccw(c-1.986,41.067) -1.986,40.056 ; -1.986,40.056 ccw(c-1.986,39.044) -2.701,39.76 cw(c-1.986,39.044) -1.986,40.056 ; -1.372,40.056 cw(c-1.372,41.681) -2.521,40.532 ccw(c-1.372,41.681) -1.372,40.056 ; -1.372,40.056 ccw(c-1.372,38.431) -2.521,39.58 cw(c-1.372,38.431) -1.372,40.056 ; 12.573,52.789 cw(c12.87,52.789) 12.66,52.999 ccw(c12.87,52.789) 12.573,52.789 ; 12.573,52.789 ccw(c12.276,52.789) 12.486,52.999 cw(c12.276,52.789) 12.573,52.789 ; 17.984,74.548 cw(c17.731,74.295) 18.089,74.295 ccw(c17.731,74.295) 17.984,74.548 ; 18.045,74.487 ccw(c18.212,74.654) 18.212,74.418 cw(c18.212,74.654) 18.045,74.487
  other v1: 18.212,74.295
SOFT_POWER: D6.1 U4.31 | length 42.9
  Top Layer w0.203: v1@22.851,65.758 ccw(c22.645,65.942) 22.884,66.08 ; v1@22.851,70.132 cw(c22.645,69.948) 22.884,69.81 ; v1(22.962,65.659) 22.813,65.807 22.813,70.159 v1@23.038,70.383 ; v1(22.962,74.371) 23.419,74.371 v1(25.298,76.251) ; v1@25.15,76.249 cw(c24.808,76.244) 25.048,76.001 cw(c25.292,75.76) v1@25.296,76.102 ; 23.32,74.371 cw(c23.32,74.729) 23.067,74.476 ccw(c23.32,74.729) 23.32,74.371 ; 23.32,74.371 ccw(c23.32,74.013) 23.067,74.266 cw(c23.32,74.013) 23.32,74.371 ; 25.045,75.997 cw(c25.298,75.744) v1@25.298,76.102 ; 25.045,75.997 ccw(c24.792,76.251) 25.15,76.251 cw(c24.792,76.251) 25.045,75.997 ; 25.045,75.997 ccw(c24.797,76.249) v1@25.15,76.25 ; 25.045,75.997 cw(c25.296,75.749) v1@25.298,76.102 ; 25.045,75.997 cw(c25.298,75.744) v1@25.298,76.102 ; 25.049,76.001 cw(c25.295,75.752) v1@25.297,76.102 ; 25.049,76.001 cw(c25.295,75.752) v1@25.297,76.102 ; 25.049,76.001 ccw(c24.799,76.248) v1@25.15,76.25 ; 25.049,76.001 ccw(c24.799,76.248) v1@25.15,76.25 ; 22.813,65.885 ccw(c23.188,65.885) 22.923,65.62 cw(c23.188,65.885) 22.813,65.885 ; 22.813,66.376 ccw(c23.678,66.376) 23.067,65.764 cw(c23.678,66.376) 22.813,66.376 ; 22.813,69.514 cw(c23.678,69.514) 23.067,70.126 ccw(c23.678,69.514) 22.813,69.514 ; 22.813,70.005 cw(c23.188,70.005) 22.923,70.27 ccw(c23.188,70.005) 22.813,70.005
  Bottom Layer w0.203: v1(22.962,70.231) v1(22.962,74.371) ; v1(25.298,76.251) 25.298,77.292 26.721,78.715 26.721,80.383 D6.1@32.544,86.205 ; 32.074,85.751 cw(c32.651,85.597) D6.1@32.458,86.163 ; 22.962,70.589 cw(c22.603,70.589) 22.857,70.336 ccw(c22.603,70.589) 22.962,70.589 ; 22.962,70.589 ccw(c23.32,70.589) 23.067,70.336 cw(c23.32,70.589) 22.962,70.589 ; 22.962,74.013 cw(c23.32,74.013) 23.067,74.266 ccw(c23.32,74.013) 22.962,74.013 ; 22.962,74.013 ccw(c22.603,74.013) 22.857,74.266 cw(c22.603,74.013) 22.962,74.013 ; 25.298,76.609 cw(c24.94,76.609) 25.193,76.356 ccw(c24.94,76.609) 25.298,76.609 ; 25.298,76.609 ccw(c25.657,76.609) 25.403,76.356 cw(c25.657,76.609) 25.298,76.609 ; 31.949,85.611 ccw(c31.354,86.205) 32.195,86.205 cw(c31.354,86.205) 31.949,85.611 ; 32.19,85.852 cw(c32.444,85.599) 32.444,85.957 ccw(c32.444,85.599) 32.19,85.852
  Bottom Layer w0.25: v1(22.962,65.659) 23.066,65.554 U4.31@23.066,64.112 ; 23.009,65.336 cw(c23.169,65.428) v1@23.045,65.566 ; v1@22.873,65.571 cw(c22.407,65.105) 23.066,65.105 ccw(c22.407,65.105) v1@22.873,65.571
SPI_CS: U4.51 U6.1 | length 26.3
  Top Layer w0.25: v1(-0.635,60.96) -0.61,60.96 -0.584,60.985 0.229,60.173 v1(0.356,60.173) ; v1@-0.635,60.835 cw(c-0.635,60.349) -0.292,60.693 ccw(c-0.635,60.349) v1@-0.635,60.835 ; -0.075,60.476 ccw(c0.356,60.906) 0.356,60.298 cw(c0.356,60.906) -0.075,60.476
  Bottom Layer w0.25: U6.1@-2.855,64.423 -2.855,63.002 -0.838,60.985 -0.584,60.985 -0.61,60.96 v1(-0.635,60.96) ; v1(0.356,60.173) 0.719,60.536 3.087,60.536 5.279,62.728 5.279,64.821 6.171,65.712 U4.51@11.966,65.712 ; -2.855,63.26 cw(c-2.39,63.26) -2.719,63.589 ccw(c-2.39,63.26) -2.855,63.26 ; -2.855,63.26 ccw(c-3.32,63.26) -2.991,63.589 cw(c-3.32,63.26) -2.855,63.26 ; 0.569,60.386 cw(c0.356,60.599) 0.356,60.298 ccw(c0.356,60.599) 0.569,60.386 ; 0.569,60.386 ccw(c0.782,60.173) 0.481,60.173 cw(c0.782,60.173) 0.569,60.386 ; -1.152,61.299 ccw(c-0.635,61.816) -0.635,61.085 cw(c-0.635,61.816) -1.152,61.299
SPI_SCK: U4.52 U6.6 | length 21.5
  Bottom Layer w0.25: U6.6@-0.315,56.423 -0.315,60.442 0.233,60.989 2.9,60.989 4.826,62.916 4.826,65.303 5.735,66.212 U4.52@11.966,66.212 ; -0.315,57.586 cw(c-0.78,57.586) -0.451,57.258 ccw(c-0.78,57.586) -0.315,57.586 ; -0.315,57.586 ccw(c0.15,57.586) -0.179,57.258 cw(c0.15,57.586) -0.315,57.586
SPI_SI: U4.54 U6.5 | length 29.5
  Top Layer w0.25: v1(0.61,62.255) 0.955,61.91 0.955,59.629 v1(0.94,59.614) ; 0.823,62.042 cw(c1.036,62.255) 0.735,62.255 ccw(c1.036,62.255) 0.823,62.042 ; 0.823,62.042 ccw(c0.61,61.829) 0.61,62.13 cw(c0.61,61.829) 0.823,62.042 ; v1@0.851,59.702 ccw(c0.601,59.952) 0.955,59.952 cw(c0.601,59.952) v1@0.851,59.702 ; 0.955,59.879 ccw(c1.205,59.879) 1.028,59.702 cw(c1.205,59.879) 0.955,59.879
  Bottom Layer w0.25: v1@0.61,62.281 v1(0.61,62.255) 0.864,62.001 2.188,62.001 3.865,63.678 3.865,65.942 5.135,67.212 U4.54@11.966,67.212 ; v1@0.646,62.136 cw(c0.835,61.51) 1.162,62.076 ; v1(0.94,59.614) 0.955,59.599 U6.5@0.955,56.423 ; 0.823,62.042 cw(c1.036,62.255) 0.735,62.255 ccw(c1.036,62.255) 0.823,62.042 ; 0.823,62.042 ccw(c0.61,61.829) 0.61,62.13 cw(c0.61,61.829) 0.823,62.042 ; 0.955,57.586 cw(c0.49,57.586) 0.819,57.258 ccw(c0.49,57.586) 0.955,57.586 ; 0.955,57.586 ccw(c1.42,57.586) 1.091,57.258 cw(c1.42,57.586) 0.955,57.586 ; v1@0.521,62.167 ccw(c0.921,62.567) 0.921,62.001 cw(c0.921,62.567) v1@0.521,62.167 ; v1@0.698,62.344 ccw(c1.525,63.17) 1.525,62.001 cw(c1.525,63.17) v1@0.698,62.344 ; v1@0.851,59.525 cw(c0.601,59.275) 0.955,59.275 ccw(c0.601,59.275) v1@0.851,59.525 ; 0.955,59.349 cw(c1.205,59.349) 1.028,59.525 ccw(c1.205,59.349) 0.955,59.349
SPI_SO: U4.53 U6.2 | length 20.8
  Bottom Layer w0.25: U6.2@-1.585,64.423 -1.585,62.804 -1.6,62.789 -0.254,61.443 2.489,61.443 4.318,63.271 4.318,65.583 5.447,66.712 U4.53@11.966,66.712 ; -1.585,63.26 cw(c-1.12,63.26) -1.449,63.589 ccw(c-1.12,63.26) -1.585,63.26 ; -1.585,63.26 ccw(c-2.05,63.26) -1.721,63.589 cw(c-2.05,63.26) -1.585,63.26
SPI_WP: U4.60 U6.3 | length 22.9
  Bottom Layer w0.25: -1.898,70.212 U4.60@11.966,70.212
  Bottom Layer w0.3: -1.898,70.212 -2.642,69.469 -2.642,67.107 -1.727,66.192 -0.584,66.192 -0.315,65.923 U6.3@-0.315,64.423 ; -0.315,65.526 cw(c-0.719,65.526) -0.433,65.24 ccw(c-0.719,65.526) -0.315,65.526 ; -0.315,65.526 ccw(c0.089,65.526) -0.197,65.24 cw(c0.089,65.526) -0.315,65.526
SPKN: U4.65 U5.2 | length 58.3
  Top Layer w0.254: v1(13.665,52.984) 20.824,60.143 20.824,72.369 v1@20.066,73.127 ; 13.875,53.194 cw(c13.665,53.404) 13.665,53.107 ccw(c13.665,53.404) 13.875,53.194 ; 13.875,53.194 ccw(c14.085,52.984) 13.788,52.984 cw(c14.085,52.984) 13.875,53.194 ; v1@20.189,73.203 ccw(c20.67,73.203) 20.33,72.863 cw(c20.67,73.203) v1@20.189,73.203
  Bottom Layer w0.25: U4.65@11.966,72.712 19.575,72.712 v1(20.066,73.203) ; 19.853,72.989 cw(c20.066,72.776) 20.066,73.078 ccw(c20.066,72.776) 19.853,72.989 ; 19.853,72.989 ccw(c19.639,73.203) 19.941,73.203 cw(c19.639,73.203) 19.853,72.989
  Bottom Layer w0.254: 8.675,43.476 cw(c8.36,42.3) U5.2@9.535,42.619 ; 9.101,43.362 cw(c8.853,42.434) U5.2@9.78,42.686 ; U5.2@9.322,42.596 7.645,44.272 7.645,45.914 13.665,51.934 v1(13.665,52.984) ; 13.665,52.687 cw(c13.962,52.687) 13.752,52.897 ccw(c13.962,52.687) 13.665,52.687 ; 13.665,52.687 ccw(c13.368,52.687) 13.578,52.897 cw(c13.368,52.687) 13.665,52.687 ; 8.083,43.834 ccw(c9.449,45.2) 9.449,43.269 cw(c9.449,45.2) 8.083,43.834 ; 8.39,43.528 cw(c7.458,42.596) 8.776,42.596 ccw(c7.458,42.596) 8.39,43.528 ; 8.517,43.401 ccw(c9.449,44.333) 9.449,43.015 cw(c9.449,44.333) 8.517,43.401